# Altium PCB Button-18PCS.PcbDoc
Units mil, origin at the board's own origin, x right, y up, seen from the top; angles counter-clockwise.
Board outline 6000 x 4000 mil, 2 copper layers (Top Layer, Bottom Layer); 54 components, 3 nets, 180 pads, 18 vias.
Unrouted connection lines stored in the file: 51.
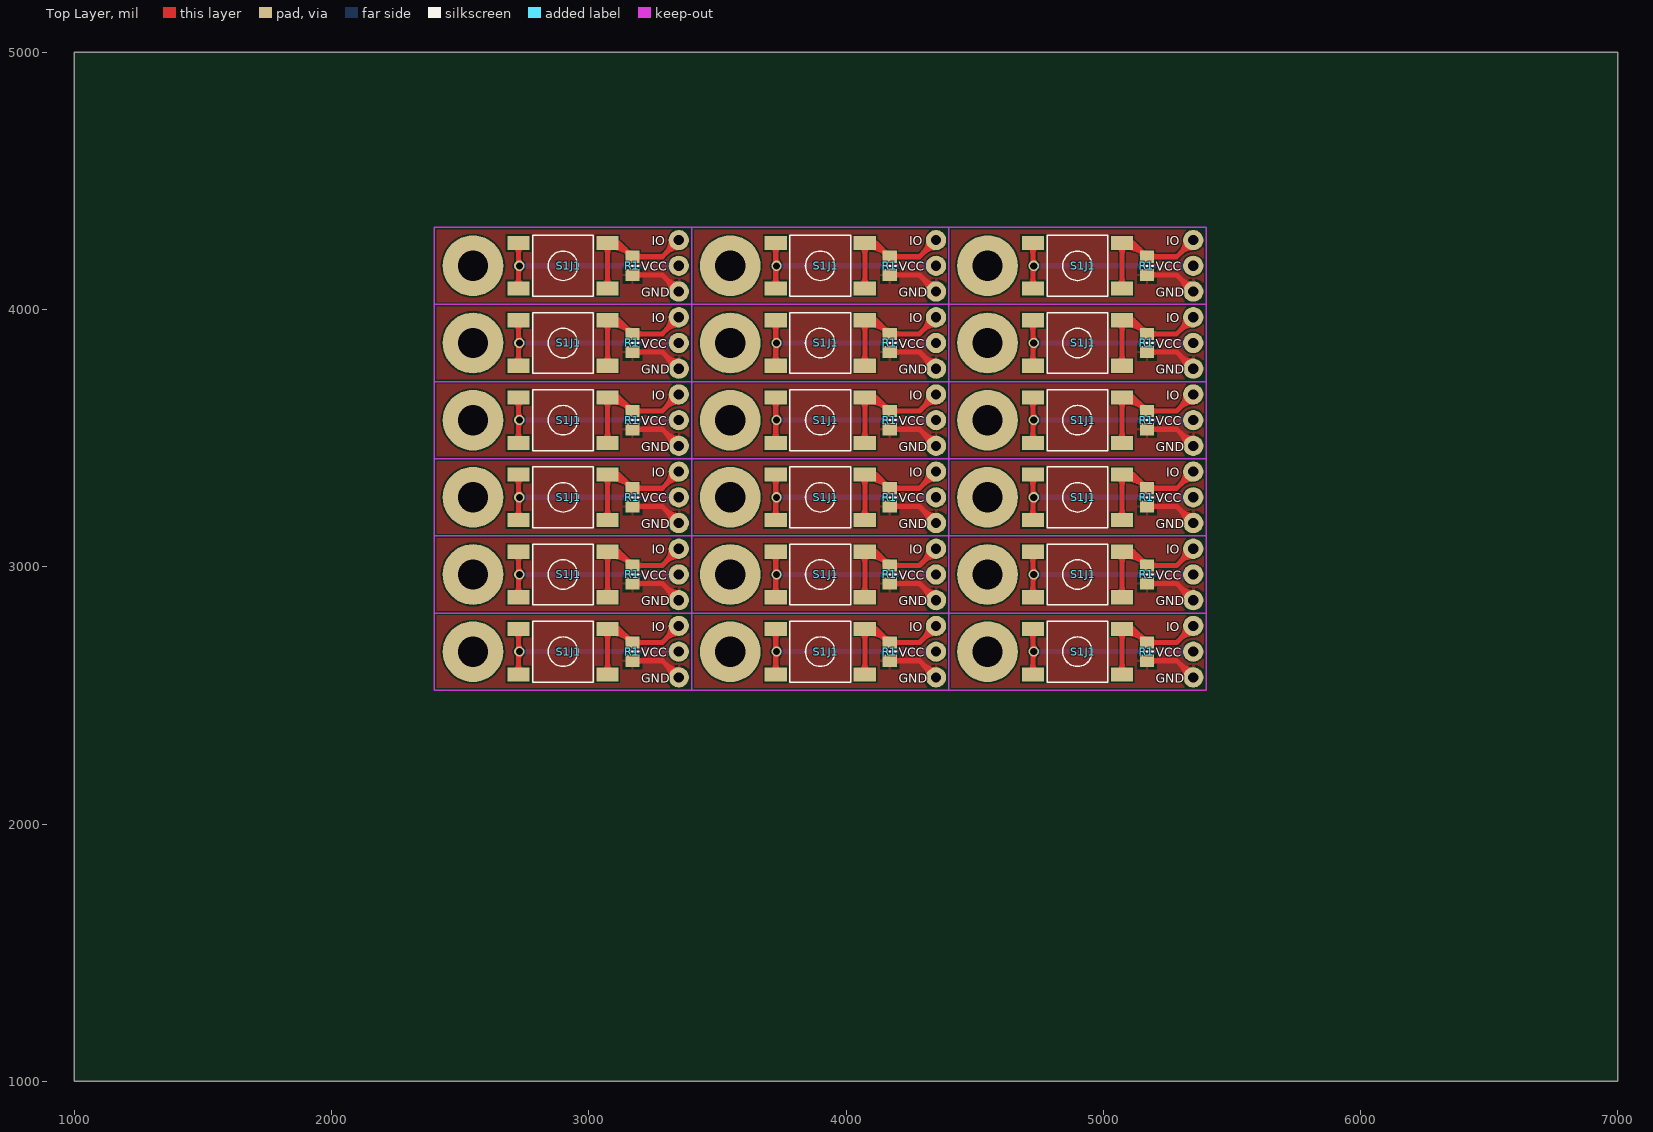
[diagram p0: Top Layer view]
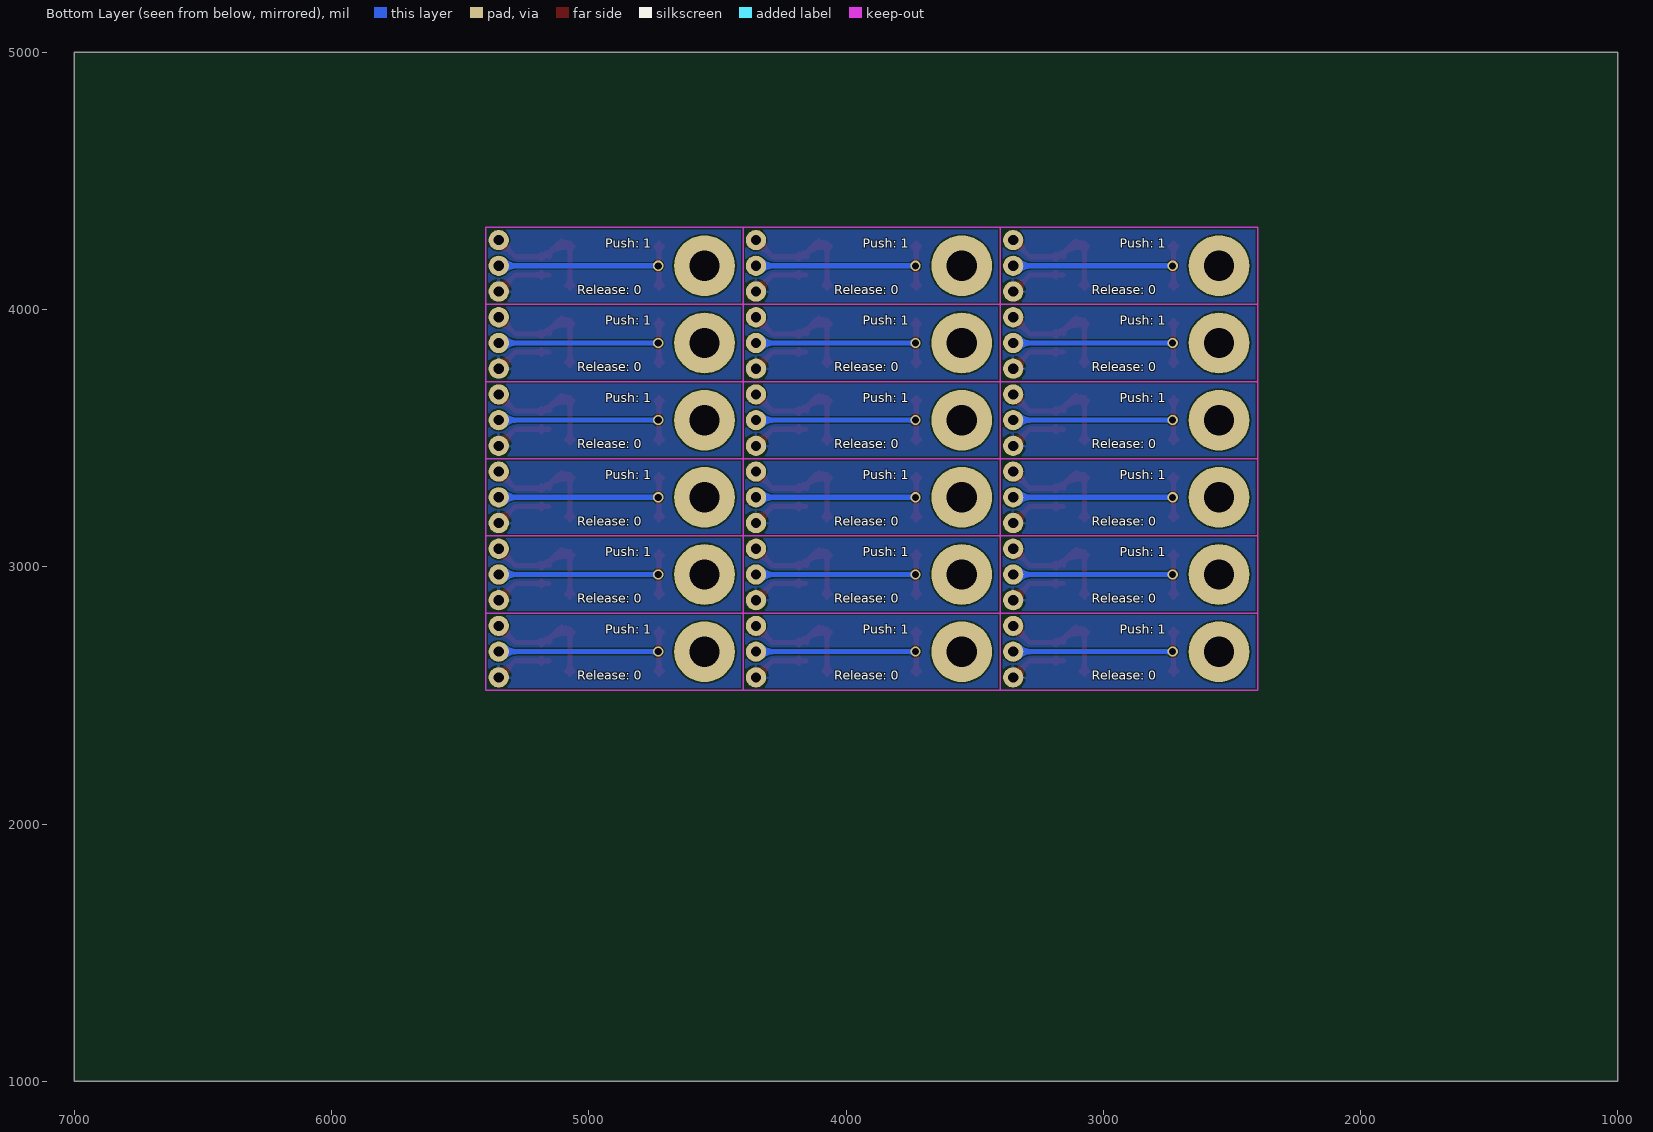
[diagram p1: Bottom Layer view, seen from below]

## Layer stack, top to bottom
Top Solder: solder mask 0.4, Solder Resist, Dk 3.5
Top Layer: signal copper 1.4
Dielectric 1: dielectric 12.6, FR-4, Dk 4.8
Bottom Layer: signal copper 1.4
Bottom Solder: solder mask 0.4, Solder Resist, Dk 3.5

## Board outline
1000,1000 7000,1000 7000,5000 1000,5000

## Design rules (kind name [scope] priority, off if disabled: settings)
Clearance [All] p1: gap=6
ComponentClearance [All] p1: gap=0 collisioncheckmode=3 verticalgap=0 showdistances=FALSE
PolygonConnect [All] p1: connectstyle=Relief reliefconductorwidth=10 reliefentries=4 polygonreliefangle="90 Angle" airgapwidth=10
RoutingVias [All] p1: holewidth=28 width=50 viastyle="Through Hole" minholewidth=28 minwidth=50 maxholewidth=28 maxwidth=50
SolderMaskExpansion [All] p1: expansion=4
Width [All] p1: maxlimit=100 minlimit=6 preferedwidth=10
28 further rules are at their usual default settings.

## Classes and differential pairs
component class Button: J1 R1 S1

## Components (designator, comment, footprint, x,y, rotation, side; value= is the part's Value field where it differs from the comment)
J1 "CON3" DevModule 3900,2970 r0 top
J1 "CON3" DevModule 3900,2670 r0 top
J1 "CON3" DevModule 3900,3570 r0 top
J1 "CON3" DevModule 3900,3270 r0 top
J1 "CON3" DevModule 3900,4170 r0 top
J1 "CON3" DevModule 3900,3870 r0 top
J1 "CON3" DevModule 2900,3870 r0 top
J1 "CON3" DevModule 2900,4170 r0 top
J1 "CON3" DevModule 2900,3270 r0 top
J1 "CON3" DevModule 2900,3570 r0 top
J1 "CON3" DevModule 2900,2670 r0 top
J1 "CON3" DevModule 2900,2970 r0 top
J1 "CON3" DevModule 4900,2970 r0 top
J1 "CON3" DevModule 4900,2670 r0 top
J1 "CON3" DevModule 4900,3570 r0 top
J1 "CON3" DevModule 4900,3270 r0 top
J1 "CON3" DevModule 4900,4170 r0 top
J1 "CON3" DevModule 4900,3870 r0 top
R1 "470R" 6-0805_N 4170,2970 r90 top
R1 "470R" 6-0805_N 4170,2670 r90 top
R1 "470R" 6-0805_N 4170,3570 r90 top
R1 "470R" 6-0805_N 4170,3270 r90 top
R1 "470R" 6-0805_N 4170,4170 r90 top
R1 "470R" 6-0805_N 4170,3870 r90 top
R1 "470R" 6-0805_N 3170,3870 r90 top
R1 "470R" 6-0805_N 3170,4170 r90 top
R1 "470R" 6-0805_N 3170,3270 r90 top
R1 "470R" 6-0805_N 3170,3570 r90 top
R1 "470R" 6-0805_N 3170,2670 r90 top
R1 "470R" 6-0805_N 3170,2970 r90 top
R1 "470R" 6-0805_N 5170,2970 r90 top
R1 "470R" 6-0805_N 5170,2670 r90 top
R1 "470R" 6-0805_N 5170,3570 r90 top
R1 "470R" 6-0805_N 5170,3270 r90 top
R1 "470R" 6-0805_N 5170,4170 r90 top
R1 "470R" 6-0805_N 5170,3870 r90 top
S1 "Button" KFCA06 3900,2970 r180 top
S1 "Button" KFCA06 3900,2670 r180 top
S1 "Button" KFCA06 3900,3570 r180 top
S1 "Button" KFCA06 3900,3270 r180 top
S1 "Button" KFCA06 3900,4170 r180 top
S1 "Button" KFCA06 3900,3870 r180 top
S1 "Button" KFCA06 2900,3870 r180 top
S1 "Button" KFCA06 2900,4170 r180 top
S1 "Button" KFCA06 2900,3270 r180 top
S1 "Button" KFCA06 2900,3570 r180 top
S1 "Button" KFCA06 2900,2670 r180 top
S1 "Button" KFCA06 2900,2970 r180 top
S1 "Button" KFCA06 4900,2970 r180 top
S1 "Button" KFCA06 4900,2670 r180 top
S1 "Button" KFCA06 4900,3570 r180 top
S1 "Button" KFCA06 4900,3270 r180 top
S1 "Button" KFCA06 4900,4170 r180 top
S1 "Button" KFCA06 4900,3870 r180 top

## Footprints (in the part's own frame and the unit in brackets; to place one, negate y for a bottom-side part, rotate by r counter-clockwise, add the part's x,y. Pads: shape width x height; smd on the part's side, far side on the other; paste and mask are expansions set on the pad)
6-0805_N [mm] "Chip Resistor, Body 2.0x1.2mm, IPC Medium Density"
  rect 1.2x1.4 smd: 1(-0.9,0) 2(0.9,0)
  silkscreen extent 0,-0.6 0,0.6, body extent -1.07,-0.7 1.07,0.7, height 0.7
DevModule [mm]
  round 6 hole 3: 0(-8.89,0)
  round 2 hole 1: 1(11.43,2.54) 2(11.43,0) 3(11.43,-2.54)
  Keep-Out Layer lines w0.152: -12.7,-3.81 12.7,-3.81 12.7,3.81 -12.7,3.81 -12.7,-3.81
KFCA06 [mm]
  rect 2.2x1.4 smd: 1(-4.4,-2.25) 1(-4.4,2.25) 2(4.4,-2.25) 2(4.4,2.25)
  silkscreen extent -3,-3 3,3

## Part data
J1 J1 J1 J1 J1 J1 J1 J1 J1 J1 J1 J1 J1 J1 J1 J1 J1 J1: "Connector"
R1 R1 R1 R1 R1 R1 R1 R1 R1 R1 R1 R1 R1 R1 R1 R1 R1 R1: library part RES1_1
S1 S1 S1 S1 S1 S1 S1 S1 S1 S1 S1 S1 S1 S1 S1 S1 S1 S1: library part SW-PB

## Via types
v1: diameter 39.37, hole 27.56, Top Layer to Bottom Layer, tented both sides, 18 vias

## Nets (pads, with @x,y where several pads share a name; then routed paths per layer and width w, separated by ;. In a path a pad name is that pad's centre, name@x,y a point inside that pad or via, vN(x,y) a via of type N, cw(c..) or ccw(c..) an arc to the next point about the centre after c; other vN are vias at no path point)
GND: J1.3 R1.1 | length 6926.1
  Top Layer w20: R1.1@3155,2634.57 3285.43,2634.57 J1.3@3350,2570 ; R1.1@3155,2934.57 3285.43,2934.57 J1.3@3350,2870 ; R1.1@3155,3234.57 3285.43,3234.57 J1.3@3350,3170 ; R1.1@3155,3534.57 3285.43,3534.57 J1.3@3350,3470 ; R1.1@3155,3834.57 3285.43,3834.57 J1.3@3350,3770 ; R1.1@3155,4134.57 3285.43,4134.57 J1.3@3350,4070 ; R1.1@3183.57,2624.93 cw(c3206.82,2601.68) 3206.82,2634.57 cw(c3206.82,2667.45) R1.1@3183.57,2644.2 ; R1.1@3183.57,2924.93 cw(c3206.82,2901.68) 3206.82,2934.57 cw(c3206.82,2967.45) R1.1@3183.57,2944.2 ; R1.1@3183.57,3224.93 cw(c3206.82,3201.68) 3206.82,3234.57 cw(c3206.82,3267.45) R1.1@3183.57,3244.2 ; R1.1@3183.57,3524.93 cw(c3206.82,3501.68) 3206.82,3534.57 cw(c3206.82,3567.45) R1.1@3183.57,3544.2 ; R1.1@3183.57,3824.93 cw(c3206.82,3801.68) 3206.82,3834.57 cw(c3206.82,3867.45) R1.1@3183.57,3844.2 ; R1.1@3183.57,4124.93 cw(c3206.82,4101.68) 3206.82,4134.57 cw(c3206.82,4167.45) R1.1@3183.57,4144.2 ; J1.3@3320.63,2570 ccw(c3249.72,2570) 3299.86,2620.14 ccw(c3350,2670.28) J1.3@3350,2599.37 ; J1.3@3320.63,2870 ccw(c3249.72,2870) 3299.86,2920.14 ccw(c3350,2970.28) J1.3@3350,2899.37 ; J1.3@3320.63,3170 ccw(c3249.72,3170) 3299.86,3220.14 ccw(c3350,3270.28) J1.3@3350,3199.37 ; J1.3@3320.63,3470 ccw(c3249.72,3470) 3299.86,3520.14 ccw(c3350,3570.28) J1.3@3350,3499.37 ; J1.3@3320.63,3770 ccw(c3249.72,3770) 3299.86,3820.14 ccw(c3350,3870.28) J1.3@3350,3799.37 ; J1.3@3320.63,4070 ccw(c3249.72,4070) 3299.86,4120.14 ccw(c3350,4170.28) J1.3@3350,4099.37 ; R1.1@4155,2634.57 4285.43,2634.57 J1.3@4350,2570 ; R1.1@4155,2934.57 4285.43,2934.57 J1.3@4350,2870 ; R1.1@4155,3234.57 4285.43,3234.57 J1.3@4350,3170 ; R1.1@4155,3534.57 4285.43,3534.57 J1.3@4350,3470 ; R1.1@4155,3834.57 4285.43,3834.57 J1.3@4350,3770 ; R1.1@4155,4134.57 4285.43,4134.57 J1.3@4350,4070 ; R1.1@4183.57,2624.93 cw(c4206.82,2601.68) 4206.82,2634.57 cw(c4206.82,2667.45) R1.1@4183.57,2644.2 ; R1.1@4183.57,2924.93 cw(c4206.82,2901.68) 4206.82,2934.57 cw(c4206.82,2967.45) R1.1@4183.57,2944.2 ; R1.1@4183.57,3224.93 cw(c4206.82,3201.68) 4206.82,3234.57 cw(c4206.82,3267.45) R1.1@4183.57,3244.2 ; R1.1@4183.57,3524.93 cw(c4206.82,3501.68) 4206.82,3534.57 cw(c4206.82,3567.45) R1.1@4183.57,3544.2 ; R1.1@4183.57,3824.93 cw(c4206.82,3801.68) 4206.82,3834.57 cw(c4206.82,3867.45) R1.1@4183.57,3844.2 ; R1.1@4183.57,4124.93 cw(c4206.82,4101.68) 4206.82,4134.57 cw(c4206.82,4167.45) R1.1@4183.57,4144.2 ; J1.3@4320.63,2570 ccw(c4249.72,2570) 4299.86,2620.14 ccw(c4350,2670.28) J1.3@4350,2599.37 ; J1.3@4320.63,2870 ccw(c4249.72,2870) 4299.86,2920.14 ccw(c4350,2970.28) J1.3@4350,2899.37 ; J1.3@4320.63,3170 ccw(c4249.72,3170) 4299.86,3220.14 ccw(c4350,3270.28) J1.3@4350,3199.37 ; J1.3@4320.63,3470 ccw(c4249.72,3470) 4299.86,3520.14 ccw(c4350,3570.28) J1.3@4350,3499.37 ; J1.3@4320.63,3770 ccw(c4249.72,3770) 4299.86,3820.14 ccw(c4350,3870.28) J1.3@4350,3799.37 ; J1.3@4320.63,4070 ccw(c4249.72,4070) 4299.86,4120.14 ccw(c4350,4170.28) J1.3@4350,4099.37 ; R1.1@5155,2634.57 5285.43,2634.57 J1.3@5350,2570 ; R1.1@5155,2934.57 5285.43,2934.57 J1.3@5350,2870 ; R1.1@5155,3234.57 5285.43,3234.57 J1.3@5350,3170 ; R1.1@5155,3534.57 5285.43,3534.57 J1.3@5350,3470 ; R1.1@5155,3834.57 5285.43,3834.57 J1.3@5350,3770 ; R1.1@5155,4134.57 5285.43,4134.57 J1.3@5350,4070 ; R1.1@5183.57,2624.93 cw(c5206.82,2601.68) 5206.82,2634.57 cw(c5206.82,2667.45) R1.1@5183.57,2644.2 ; R1.1@5183.57,2924.93 cw(c5206.82,2901.68) 5206.82,2934.57 cw(c5206.82,2967.45) R1.1@5183.57,2944.2 ; R1.1@5183.57,3224.93 cw(c5206.82,3201.68) 5206.82,3234.57 cw(c5206.82,3267.45) R1.1@5183.57,3244.2 ; R1.1@5183.57,3524.93 cw(c5206.82,3501.68) 5206.82,3534.57 cw(c5206.82,3567.45) R1.1@5183.57,3544.2 ; R1.1@5183.57,3824.93 cw(c5206.82,3801.68) 5206.82,3834.57 cw(c5206.82,3867.45) R1.1@5183.57,3844.2 ; R1.1@5183.57,4124.93 cw(c5206.82,4101.68) 5206.82,4134.57 cw(c5206.82,4167.45) R1.1@5183.57,4144.2 ; J1.3@5320.63,2570 ccw(c5249.72,2570) 5299.86,2620.14 ccw(c5350,2670.28) J1.3@5350,2599.37 ; J1.3@5320.63,2870 ccw(c5249.72,2870) 5299.86,2920.14 ccw(c5350,2970.28) J1.3@5350,2899.37 ; J1.3@5320.63,3170 ccw(c5249.72,3170) 5299.86,3220.14 ccw(c5350,3270.28) J1.3@5350,3199.37 ; J1.3@5320.63,3470 ccw(c5249.72,3470) 5299.86,3520.14 ccw(c5350,3570.28) J1.3@5350,3499.37 ; J1.3@5320.63,3770 ccw(c5249.72,3770) 5299.86,3820.14 ccw(c5350,3870.28) J1.3@5350,3799.37 ; J1.3@5320.63,4070 ccw(c5249.72,4070) 5299.86,4120.14 ccw(c5350,4170.28) J1.3@5350,4099.37
NetJ1_1: J1.1 R1.2 S1.1 | length 18268.9
  Top Layer w20: S1.1@3060.81,2593.83 ccw(c3030.84,2623.81) 3073.23,2623.81 ccw(c3115.62,2623.81) S1.1@3085.64,2593.83 ; S1.1@3060.81,2746.17 cw(c3030.84,2716.19) 3073.23,2716.19 cw(c3115.62,2716.19) S1.1@3085.64,2746.17 ; S1.1@3060.81,2893.83 ccw(c3030.84,2923.81) 3073.23,2923.81 ccw(c3115.62,2923.81) S1.1@3085.64,2893.83 ; S1.1@3060.81,3046.17 cw(c3030.84,3016.19) 3073.23,3016.19 cw(c3115.62,3016.19) S1.1@3085.64,3046.17 ; S1.1@3060.81,3193.83 ccw(c3030.84,3223.81) 3073.23,3223.81 ccw(c3115.62,3223.81) S1.1@3085.64,3193.83 ; S1.1@3060.81,3346.17 cw(c3030.84,3316.19) 3073.23,3316.19 cw(c3115.62,3316.19) S1.1@3085.64,3346.17 ; S1.1@3060.81,3493.83 ccw(c3030.84,3523.81) 3073.23,3523.81 ccw(c3115.62,3523.81) S1.1@3085.64,3493.83 ; S1.1@3060.81,3646.17 cw(c3030.84,3616.19) 3073.23,3616.19 cw(c3115.62,3616.19) S1.1@3085.64,3646.17 ; S1.1@3060.81,3793.83 ccw(c3030.84,3823.81) 3073.23,3823.81 ccw(c3115.62,3823.81) S1.1@3085.64,3793.83 ; S1.1@3060.81,3946.17 cw(c3030.84,3916.19) 3073.23,3916.19 cw(c3115.62,3916.19) S1.1@3085.64,3946.17 ; S1.1@3060.81,4093.83 ccw(c3030.84,4123.81) 3073.23,4123.81 ccw(c3115.62,4123.81) S1.1@3085.64,4093.83 ; S1.1@3060.81,4246.17 cw(c3030.84,4216.19) 3073.23,4216.19 cw(c3115.62,4216.19) S1.1@3085.64,4246.17 ; S1.1@3073.23,2581.42 3073.23,2758.58 3116.85,2758.58 ; S1.1@3073.23,2881.42 3073.23,3058.58 3116.85,3058.58 ; S1.1@3073.23,3181.42 3073.23,3358.58 3116.85,3358.58 ; S1.1@3073.23,3481.42 3073.23,3658.58 3116.85,3658.58 ; S1.1@3073.23,3781.42 3073.23,3958.58 3116.85,3958.58 ; S1.1@3073.23,4081.42 3073.23,4258.58 3116.85,4258.58 ; S1.1@3088.98,2741.02 cw(c3088.98,2631.34) R1.2@3166.54,2708.9 ; S1.1@3088.98,2761.02 cw(c3088.98,2699.62) 3132.39,2743.04 ; S1.1@3088.98,3041.02 cw(c3088.98,2931.34) R1.2@3166.54,3008.9 ; S1.1@3088.98,3061.02 cw(c3088.98,2999.62) 3132.39,3043.04 ; S1.1@3088.98,3341.02 cw(c3088.98,3231.34) R1.2@3166.54,3308.9 ; S1.1@3088.98,3361.02 cw(c3088.98,3299.62) 3132.39,3343.04 ; S1.1@3088.98,3641.02 cw(c3088.98,3531.34) R1.2@3166.54,3608.9 ; S1.1@3088.98,3661.02 cw(c3088.98,3599.62) 3132.39,3643.04 ; S1.1@3088.98,3941.02 cw(c3088.98,3831.34) R1.2@3166.54,3908.9 ; S1.1@3088.98,3961.02 cw(c3088.98,3899.62) 3132.39,3943.04 ; S1.1@3088.98,4241.02 cw(c3088.98,4131.34) R1.2@3166.54,4208.9 ; S1.1@3088.98,4261.02 cw(c3088.98,4199.62) 3132.39,4243.04 ; S1.1@3104.81,2751 cw(c3116.85,2745.24) 3116.85,2758.58 ; S1.1@3104.81,2766.16 ccw(c3116.85,2771.93) 3116.85,2758.58 ; S1.1@3104.81,3051 cw(c3116.85,3045.24) 3116.85,3058.58 ; S1.1@3104.81,3066.16 ccw(c3116.85,3071.93) 3116.85,3058.58 ; S1.1@3104.81,3351 cw(c3116.85,3345.24) 3116.85,3358.58 ; S1.1@3104.81,3366.16 ccw(c3116.85,3371.93) 3116.85,3358.58 ; S1.1@3104.81,3651 cw(c3116.85,3645.24) 3116.85,3658.58 ; S1.1@3104.81,3666.16 ccw(c3116.85,3671.93) 3116.85,3658.58 ; S1.1@3104.81,3951 cw(c3116.85,3945.24) 3116.85,3958.58 ; S1.1@3104.81,3966.16 ccw(c3116.85,3971.93) 3116.85,3958.58 ; S1.1@3104.81,4251 cw(c3116.85,4245.24) 3116.85,4258.58 ; S1.1@3104.81,4266.16 ccw(c3116.85,4271.93) 3116.85,4258.58 ; 3140.02,2735.41 cw(c3110.05,2705.43) R1.2@3152.44,2705.43 ; 3140.02,3035.41 cw(c3110.05,3005.43) R1.2@3152.44,3005.43 ; 3140.02,3335.41 cw(c3110.05,3305.43) R1.2@3152.44,3305.43 ; 3140.02,3635.41 cw(c3110.05,3605.43) R1.2@3152.44,3605.43 ; 3140.02,3935.41 cw(c3110.05,3905.43) R1.2@3152.44,3905.43 ; 3140.02,4235.41 cw(c3110.05,4205.43) R1.2@3152.44,4205.43 ; R1.2@3149.53,2725.9 ccw(c3166.06,2742.44) R1.2@3166.06,2719.06 ; R1.2@3149.53,3025.9 ccw(c3166.06,3042.44) R1.2@3166.06,3019.06 ; R1.2@3149.53,3325.9 ccw(c3166.06,3342.44) R1.2@3166.06,3319.06 ; R1.2@3149.53,3625.9 ccw(c3166.06,3642.44) R1.2@3166.06,3619.06 ; R1.2@3149.53,3925.9 ccw(c3166.06,3942.44) R1.2@3166.06,3919.06 ; R1.2@3149.53,4225.9 ccw(c3166.06,4242.44) R1.2@3166.06,4219.06 ; R1.2@3183.57,2695.8 cw(c3206.82,2672.55) 3206.82,2705.43 cw(c3206.82,2738.32) R1.2@3183.57,2715.07 ; R1.2@3183.57,2995.8 cw(c3206.82,2972.55) 3206.82,3005.43 cw(c3206.82,3038.32) R1.2@3183.57,3015.07 ; R1.2@3183.57,3295.8 cw(c3206.82,3272.55) 3206.82,3305.43 cw(c3206.82,3338.32) R1.2@3183.57,3315.07 ; R1.2@3183.57,3595.8 cw(c3206.82,3572.55) 3206.82,3605.43 cw(c3206.82,3638.32) R1.2@3183.57,3615.07 ; R1.2@3183.57,3895.8 cw(c3206.82,3872.55) 3206.82,3905.43 cw(c3206.82,3938.32) R1.2@3183.57,3915.07 ; R1.2@3183.57,4195.8 cw(c3206.82,4172.55) 3206.82,4205.43 cw(c3206.82,4238.32) R1.2@3183.57,4215.07 ; J1.1@3320.63,2770 cw(c3249.72,2770) 3299.86,2719.86 cw(c3350,2669.72) J1.1@3350,2740.63 ; J1.1@3320.63,3070 cw(c3249.72,3070) 3299.86,3019.86 cw(c3350,2969.72) J1.1@3350,3040.63 ; J1.1@3320.63,3370 cw(c3249.72,3370) 3299.86,3319.86 cw(c3350,3269.72) J1.1@3350,3340.63 ; J1.1@3320.63,3670 cw(c3249.72,3670) 3299.86,3619.86 cw(c3350,3569.72) J1.1@3350,3640.63 ; J1.1@3320.63,3970 cw(c3249.72,3970) 3299.86,3919.86 cw(c3350,3869.72) J1.1@3350,3940.63 ; J1.1@3320.63,4270 cw(c3249.72,4270) 3299.86,4219.86 cw(c3350,4169.72) J1.1@3350,4240.63 ; J1.1@3350,2770 3285.43,2705.43 3170,2705.43 3116.85,2758.58 ; J1.1@3350,3070 3285.43,3005.43 3170,3005.43 3116.85,3058.58 ; J1.1@3350,3370 3285.43,3305.43 3170,3305.43 3116.85,3358.58 ; J1.1@3350,3670 3285.43,3605.43 3170,3605.43 3116.85,3658.58 ; J1.1@3350,3970 3285.43,3905.43 3170,3905.43 3116.85,3958.58 ; J1.1@3350,4270 3285.43,4205.43 3170,4205.43 3116.85,4258.58 ; S1.1@4060.81,2593.83 ccw(c4030.84,2623.81) 4073.23,2623.81 ccw(c4115.62,2623.81) S1.1@4085.64,2593.83 ; S1.1@4060.81,2746.17 cw(c4030.84,2716.19) 4073.23,2716.19 cw(c4115.62,2716.19) S1.1@4085.64,2746.17 ; S1.1@4060.81,2893.83 ccw(c4030.84,2923.81) 4073.23,2923.81 ccw(c4115.62,2923.81) S1.1@4085.64,2893.83 ; S1.1@4060.81,3046.17 cw(c4030.84,3016.19) 4073.23,3016.19 cw(c4115.62,3016.19) S1.1@4085.64,3046.17 ; S1.1@4060.81,3193.83 ccw(c4030.84,3223.81) 4073.23,3223.81 ccw(c4115.62,3223.81) S1.1@4085.64,3193.83 ; S1.1@4060.81,3346.17 cw(c4030.84,3316.19) 4073.23,3316.19 cw(c4115.62,3316.19) S1.1@4085.64,3346.17 ; S1.1@4060.81,3493.83 ccw(c4030.84,3523.81) 4073.23,3523.81 ccw(c4115.62,3523.81) S1.1@4085.64,3493.83 ; S1.1@4060.81,3646.17 cw(c4030.84,3616.19) 4073.23,3616.19 cw(c4115.62,3616.19) S1.1@4085.64,3646.17 ; S1.1@4060.81,3793.83 ccw(c4030.84,3823.81) 4073.23,3823.81 ccw(c4115.62,3823.81) S1.1@4085.64,3793.83 ; S1.1@4060.81,3946.17 cw(c4030.84,3916.19) 4073.23,3916.19 cw(c4115.62,3916.19) S1.1@4085.64,3946.17 ; S1.1@4060.81,4093.83 ccw(c4030.84,4123.81) 4073.23,4123.81 ccw(c4115.62,4123.81) S1.1@4085.64,4093.83 ; S1.1@4060.81,4246.17 cw(c4030.84,4216.19) 4073.23,4216.19 cw(c4115.62,4216.19) S1.1@4085.64,4246.17 ; S1.1@4073.23,2581.42 4073.23,2758.58 4116.85,2758.58 ; S1.1@4073.23,2881.42 4073.23,3058.58 4116.85,3058.58 ; S1.1@4073.23,3181.42 4073.23,3358.58 4116.85,3358.58 ; S1.1@4073.23,3481.42 4073.23,3658.58 4116.85,3658.58 ; S1.1@4073.23,3781.42 4073.23,3958.58 4116.85,3958.58 ; S1.1@4073.23,4081.42 4073.23,4258.58 4116.85,4258.58 ; S1.1@4088.98,2741.02 cw(c4088.98,2631.34) R1.2@4166.54,2708.9 ; S1.1@4088.98,2761.02 cw(c4088.98,2699.62) 4132.39,2743.04 ; S1.1@4088.98,3041.02 cw(c4088.98,2931.34) R1.2@4166.54,3008.9 ; S1.1@4088.98,3061.02 cw(c4088.98,2999.62) 4132.39,3043.04 ; S1.1@4088.98,3341.02 cw(c4088.98,3231.34) R1.2@4166.54,3308.9 ; S1.1@4088.98,3361.02 cw(c4088.98,3299.62) 4132.39,3343.04 ; S1.1@4088.98,3641.02 cw(c4088.98,3531.34) R1.2@4166.54,3608.9 ; S1.1@4088.98,3661.02 cw(c4088.98,3599.62) 4132.39,3643.04 ; S1.1@4088.98,3941.02 cw(c4088.98,3831.34) R1.2@4166.54,3908.9 ; S1.1@4088.98,3961.02 cw(c4088.98,3899.62) 4132.39,3943.04 ; S1.1@4088.98,4241.02 cw(c4088.98,4131.34) R1.2@4166.54,4208.9 ; S1.1@4088.98,4261.02 cw(c4088.98,4199.62) 4132.39,4243.04 ; S1.1@4104.81,2751 cw(c4116.85,2745.24) 4116.85,2758.58 ; S1.1@4104.81,2766.16 ccw(c4116.85,2771.93) 4116.85,2758.58 ; S1.1@4104.81,3051 cw(c4116.85,3045.24) 4116.85,3058.58 ; S1.1@4104.81,3066.16 ccw(c4116.85,3071.93) 4116.85,3058.58 ; S1.1@4104.81,3351 cw(c4116.85,3345.24) 4116.85,3358.58 ; S1.1@4104.81,3366.16 ccw(c4116.85,3371.93) 4116.85,3358.58 ; S1.1@4104.81,3651 cw(c4116.85,3645.24) 4116.85,3658.58 ; S1.1@4104.81,3666.16 ccw(c4116.85,3671.93) 4116.85,3658.58 ; S1.1@4104.81,3951 cw(c4116.85,3945.24) 4116.85,3958.58 ; S1.1@4104.81,3966.16 ccw(c4116.85,3971.93) 4116.85,3958.58 ; S1.1@4104.81,4251 cw(c4116.85,4245.24) 4116.85,4258.58 ; S1.1@4104.81,4266.16 ccw(c4116.85,4271.93) 4116.85,4258.58 ; 4140.02,2735.41 cw(c4110.05,2705.43) R1.2@4152.44,2705.43 ; 4140.02,3035.41 cw(c4110.05,3005.43) R1.2@4152.44,3005.43 ; 4140.02,3335.41 cw(c4110.05,3305.43) R1.2@4152.44,3305.43 ; 4140.02,3635.41 cw(c4110.05,3605.43) R1.2@4152.44,3605.43 ; 4140.02,3935.41 cw(c4110.05,3905.43) R1.2@4152.44,3905.43 ; 4140.02,4235.41 cw(c4110.05,4205.43) R1.2@4152.44,4205.43 ; R1.2@4149.53,2725.9 ccw(c4166.06,2742.44) R1.2@4166.06,2719.06 ; R1.2@4149.53,3025.9 ccw(c4166.06,3042.44) R1.2@4166.06,3019.06 ; R1.2@4149.53,3325.9 ccw(c4166.06,3342.44) R1.2@4166.06,3319.06 ; R1.2@4149.53,3625.9 ccw(c4166.06,3642.44) R1.2@4166.06,3619.06 ; R1.2@4149.53,3925.9 ccw(c4166.06,3942.44) R1.2@4166.06,3919.06 ; R1.2@4149.53,4225.9 ccw(c4166.06,4242.44) R1.2@4166.06,4219.06 ; R1.2@4183.57,2695.8 cw(c4206.82,2672.55) 4206.82,2705.43 cw(c4206.82,2738.32) R1.2@4183.57,2715.07 ; R1.2@4183.57,2995.8 cw(c4206.82,2972.55) 4206.82,3005.43 cw(c4206.82,3038.32) R1.2@4183.57,3015.07 ; R1.2@4183.57,3295.8 cw(c4206.82,3272.55) 4206.82,3305.43 cw(c4206.82,3338.32) R1.2@4183.57,3315.07 ; R1.2@4183.57,3595.8 cw(c4206.82,3572.55) 4206.82,3605.43 cw(c4206.82,3638.32) R1.2@4183.57,3615.07 ; R1.2@4183.57,3895.8 cw(c4206.82,3872.55) 4206.82,3905.43 cw(c4206.82,3938.32) R1.2@4183.57,3915.07 ; R1.2@4183.57,4195.8 cw(c4206.82,4172.55) 4206.82,4205.43 cw(c4206.82,4238.32) R1.2@4183.57,4215.07 ; J1.1@4320.63,2770 cw(c4249.72,2770) 4299.86,2719.86 cw(c4350,2669.72) J1.1@4350,2740.63 ; J1.1@4320.63,3070 cw(c4249.72,3070) 4299.86,3019.86 cw(c4350,2969.72) J1.1@4350,3040.63 ; J1.1@4320.63,3370 cw(c4249.72,3370) 4299.86,3319.86 cw(c4350,3269.72) J1.1@4350,3340.63 ; J1.1@4320.63,3670 cw(c4249.72,3670) 4299.86,3619.86 cw(c4350,3569.72) J1.1@4350,3640.63 ; J1.1@4320.63,3970 cw(c4249.72,3970) 4299.86,3919.86 cw(c4350,3869.72) J1.1@4350,3940.63 ; J1.1@4320.63,4270 cw(c4249.72,4270) 4299.86,4219.86 cw(c4350,4169.72) J1.1@4350,4240.63 ; J1.1@4350,2770 4285.43,2705.43 4170,2705.43 4116.85,2758.58 ; J1.1@4350,3070 4285.43,3005.43 4170,3005.43 4116.85,3058.58 ; J1.1@4350,3370 4285.43,3305.43 4170,3305.43 4116.85,3358.58 ; J1.1@4350,3670 4285.43,3605.43 4170,3605.43 4116.85,3658.58 ; J1.1@4350,3970 4285.43,3905.43 4170,3905.43 4116.85,3958.58 ; J1.1@4350,4270 4285.43,4205.43 4170,4205.43 4116.85,4258.58 ; S1.1@5060.81,2593.83 ccw(c5030.84,2623.81) 5073.23,2623.81 ccw(c5115.62,2623.81) S1.1@5085.64,2593.83 ; S1.1@5060.81,2746.17 cw(c5030.84,2716.19) 5073.23,2716.19 cw(c5115.62,2716.19) S1.1@5085.64,2746.17 ; S1.1@5060.81,2893.83 ccw(c5030.84,2923.81) 5073.23,2923.81 ccw(c5115.62,2923.81) S1.1@5085.64,2893.83 ; S1.1@5060.81,3046.17 cw(c5030.84,3016.19) 5073.23,3016.19 cw(c5115.62,3016.19) S1.1@5085.64,3046.17 ; S1.1@5060.81,3193.83 ccw(c5030.84,3223.81) 5073.23,3223.81 ccw(c5115.62,3223.81) S1.1@5085.64,3193.83 ; S1.1@5060.81,3346.17 cw(c5030.84,3316.19) 5073.23,3316.19 cw(c5115.62,3316.19) S1.1@5085.64,3346.17 ; S1.1@5060.81,3493.83 ccw(c5030.84,3523.81) 5073.23,3523.81 ccw(c5115.62,3523.81) S1.1@5085.64,3493.83 ; S1.1@5060.81,3646.17 cw(c5030.84,3616.19) 5073.23,3616.19 cw(c5115.62,3616.19) S1.1@5085.64,3646.17 ; S1.1@5060.81,3793.83 ccw(c5030.84,3823.81) 5073.23,3823.81 ccw(c5115.62,3823.81) S1.1@5085.64,3793.83 ; S1.1@5060.81,3946.17 cw(c5030.84,3916.19) 5073.23,3916.19 cw(c5115.62,3916.19) S1.1@5085.64,3946.17 ; S1.1@5060.81,4093.83 ccw(c5030.84,4123.81) 5073.23,4123.81 ccw(c5115.62,4123.81) S1.1@5085.64,4093.83 ; S1.1@5060.81,4246.17 cw(c5030.84,4216.19) 5073.23,4216.19 cw(c5115.62,4216.19) S1.1@5085.64,4246.17 ; S1.1@5073.23,2581.42 5073.23,2758.58 5116.85,2758.58 ; S1.1@5073.23,2881.42 5073.23,3058.58 5116.85,3058.58 ; S1.1@5073.23,3181.42 5073.23,3358.58 5116.85,3358.58 ; S1.1@5073.23,3481.42 5073.23,3658.58 5116.85,3658.58 ; S1.1@5073.23,3781.42 5073.23,3958.58 5116.85,3958.58 ; S1.1@5073.23,4081.42 5073.23,4258.58 5116.85,4258.58 ; S1.1@5088.98,2741.02 cw(c5088.98,2631.34) R1.2@5166.54,2708.9 ; S1.1@5088.98,2761.02 cw(c5088.98,2699.62) 5132.39,2743.04 ; S1.1@5088.98,3041.02 cw(c5088.98,2931.34) R1.2@5166.54,3008.9 ; S1.1@5088.98,3061.02 cw(c5088.98,2999.62) 5132.39,3043.04 ; S1.1@5088.98,3341.02 cw(c5088.98,3231.34) R1.2@5166.54,3308.9 ; S1.1@5088.98,3361.02 cw(c5088.98,3299.62) 5132.39,3343.04 ; S1.1@5088.98,3641.02 cw(c5088.98,3531.34) R1.2@5166.54,3608.9 ; S1.1@5088.98,3661.02 cw(c5088.98,3599.62) 5132.39,3643.04 ; S1.1@5088.98,3941.02 cw(c5088.98,3831.34) R1.2@5166.54,3908.9 ; S1.1@5088.98,3961.02 cw(c5088.98,3899.62) 5132.39,3943.04 ; S1.1@5088.98,4241.02 cw(c5088.98,4131.34) R1.2@5166.54,4208.9 ; S1.1@5088.98,4261.02 cw(c5088.98,4199.62) 5132.39,4243.04 ; S1.1@5104.81,2751 cw(c5116.85,2745.24) 5116.85,2758.58 ; S1.1@5104.81,2766.16 ccw(c5116.85,2771.93) 5116.85,2758.58 ; S1.1@5104.81,3051 cw(c5116.85,3045.24) 5116.85,3058.58 ; S1.1@5104.81,3066.16 ccw(c5116.85,3071.93) 5116.85,3058.58 ; S1.1@5104.81,3351 cw(c5116.85,3345.24) 5116.85,3358.58 ; S1.1@5104.81,3366.16 ccw(c5116.85,3371.93) 5116.85,3358.58 ; S1.1@5104.81,3651 cw(c5116.85,3645.24) 5116.85,3658.58 ; S1.1@5104.81,3666.16 ccw(c5116.85,3671.93) 5116.85,3658.58 ; S1.1@5104.81,3951 cw(c5116.85,3945.24) 5116.85,3958.58 ; S1.1@5104.81,3966.16 ccw(c5116.85,3971.93) 5116.85,3958.58 ; S1.1@5104.81,4251 cw(c5116.85,4245.24) 5116.85,4258.58 ; S1.1@5104.81,4266.16 ccw(c5116.85,4271.93) 5116.85,4258.58 ; 5140.02,2735.41 cw(c5110.05,2705.43) R1.2@5152.44,2705.43 ; 5140.02,3035.41 cw(c5110.05,3005.43) R1.2@5152.44,3005.43 ; 5140.02,3335.41 cw(c5110.05,3305.43) R1.2@5152.44,3305.43 ; 5140.02,3635.41 cw(c5110.05,3605.43) R1.2@5152.44,3605.43 ; 5140.02,3935.41 cw(c5110.05,3905.43) R1.2@5152.44,3905.43 ; 5140.02,4235.41 cw(c5110.05,4205.43) R1.2@5152.44,4205.43 ; R1.2@5149.53,2725.9 ccw(c5166.06,2742.44) R1.2@5166.06,2719.06 ; R1.2@5149.53,3025.9 ccw(c5166.06,3042.44) R1.2@5166.06,3019.06 ; R1.2@5149.53,3325.9 ccw(c5166.06,3342.44) R1.2@5166.06,3319.06 ; R1.2@5149.53,3625.9 ccw(c5166.06,3642.44) R1.2@5166.06,3619.06 ; R1.2@5149.53,3925.9 ccw(c5166.06,3942.44) R1.2@5166.06,3919.06 ; R1.2@5149.53,4225.9 ccw(c5166.06,4242.44) R1.2@5166.06,4219.06 ; R1.2@5183.57,2695.8 cw(c5206.82,2672.55) 5206.82,2705.43 cw(c5206.82,2738.32) R1.2@5183.57,2715.07 ; R1.2@5183.57,2995.8 cw(c5206.82,2972.55) 5206.82,3005.43 cw(c5206.82,3038.32) R1.2@5183.57,3015.07 ; R1.2@5183.57,3295.8 cw(c5206.82,3272.55) 5206.82,3305.43 cw(c5206.82,3338.32) R1.2@5183.57,3315.07 ; R1.2@5183.57,3595.8 cw(c5206.82,3572.55) 5206.82,3605.43 cw(c5206.82,3638.32) R1.2@5183.57,3615.07 ; R1.2@5183.57,3895.8 cw(c5206.82,3872.55) 5206.82,3905.43 cw(c5206.82,3938.32) R1.2@5183.57,3915.07 ; R1.2@5183.57,4195.8 cw(c5206.82,4172.55) 5206.82,4205.43 cw(c5206.82,4238.32) R1.2@5183.57,4215.07 ; J1.1@5320.63,2770 cw(c5249.72,2770) 5299.86,2719.86 cw(c5350,2669.72) J1.1@5350,2740.63 ; J1.1@5320.63,3070 cw(c5249.72,3070) 5299.86,3019.86 cw(c5350,2969.72) J1.1@5350,3040.63 ; J1.1@5320.63,3370 cw(c5249.72,3370) 5299.86,3319.86 cw(c5350,3269.72) J1.1@5350,3340.63 ; J1.1@5320.63,3670 cw(c5249.72,3670) 5299.86,3619.86 cw(c5350,3569.72) J1.1@5350,3640.63 ; J1.1@5320.63,3970 cw(c5249.72,3970) 5299.86,3919.86 cw(c5350,3869.72) J1.1@5350,3940.63 ; J1.1@5320.63,4270 cw(c5249.72,4270) 5299.86,4219.86 cw(c5350,4169.72) J1.1@5350,4240.63 ; J1.1@5350,2770 5285.43,2705.43 5170,2705.43 5116.85,2758.58 ; J1.1@5350,3070 5285.43,3005.43 5170,3005.43 5116.85,3058.58 ; J1.1@5350,3370 5285.43,3305.43 5170,3305.43 5116.85,3358.58 ; J1.1@5350,3670 5285.43,3605.43 5170,3605.43 5116.85,3658.58 ; J1.1@5350,3970 5285.43,3905.43 5170,3905.43 5116.85,3958.58 ; J1.1@5350,4270 5285.43,4205.43 5170,4205.43 5116.85,4258.58
VCC: J1.2 S1.2 | length 20384.8
  Top Layer w20: S1.2@2714.36,2593.83 ccw(c2684.38,2623.81) 2726.77,2623.81 ccw(c2769.16,2623.81) S1.2@2739.19,2593.83 ; S1.2@2714.36,2746.17 cw(c2684.38,2716.19) 2726.77,2716.19 cw(c2769.16,2716.19) S1.2@2739.19,2746.17 ; S1.2@2714.36,2893.83 ccw(c2684.38,2923.81) 2726.77,2923.81 ccw(c2769.16,2923.81) S1.2@2739.19,2893.83 ; S1.2@2714.36,3046.17 cw(c2684.38,3016.19) 2726.77,3016.19 cw(c2769.16,3016.19) S1.2@2739.19,3046.17 ; S1.2@2714.36,3193.83 ccw(c2684.38,3223.81) 2726.77,3223.81 ccw(c2769.16,3223.81) S1.2@2739.19,3193.83 ; S1.2@2714.36,3346.17 cw(c2684.38,3316.19) 2726.77,3316.19 cw(c2769.16,3316.19) S1.2@2739.19,3346.17 ; S1.2@2714.36,3493.83 ccw(c2684.38,3523.81) 2726.77,3523.81 ccw(c2769.16,3523.81) S1.2@2739.19,3493.83 ; S1.2@2714.36,3646.17 cw(c2684.38,3616.19) 2726.77,3616.19 cw(c2769.16,3616.19) S1.2@2739.19,3646.17 ; S1.2@2714.36,3793.83 ccw(c2684.38,3823.81) 2726.77,3823.81 ccw(c2769.16,3823.81) S1.2@2739.19,3793.83 ; S1.2@2714.36,3946.17 cw(c2684.38,3916.19) 2726.77,3916.19 cw(c2769.16,3916.19) S1.2@2739.19,3946.17 ; S1.2@2714.36,4093.83 ccw(c2684.38,4123.81) 2726.77,4123.81 ccw(c2769.16,4123.81) S1.2@2739.19,4093.83 ; S1.2@2714.36,4246.17 cw(c2684.38,4216.19) 2726.77,4216.19 cw(c2769.16,4216.19) S1.2@2739.19,4246.17 ; S1.2@2726.77,2581.42 S1.2@2726.77,2758.58 ; 2726.77,2638.82 cw(c2761.18,2638.82) v1@2736.85,2663.15 ; 2726.77,2701.18 ccw(c2761.18,2701.18) v1@2736.85,2676.85 ; S1.2@2726.77,2881.42 S1.2@2726.77,3058.58 ; 2726.77,2938.82 cw(c2761.18,2938.82) v1@2736.85,2963.15 ; 2726.77,3001.18 ccw(c2761.18,3001.18) v1@2736.85,2976.85 ; S1.2@2726.77,3181.42 S1.2@2726.77,3358.58 ; 2726.77,3238.82 cw(c2761.18,3238.82) v1@2736.85,3263.15 ; 2726.77,3301.18 ccw(c2761.18,3301.18) v1@2736.85,3276.85 ; S1.2@2726.77,3481.42 S1.2@2726.77,3658.58 ; 2726.77,3538.82 cw(c2761.18,3538.82) v1@2736.85,3563.15 ; 2726.77,3601.18 ccw(c2761.18,3601.18) v1@2736.85,3576.85 ; S1.2@2726.77,3781.42 S1.2@2726.77,3958.58 ; 2726.77,3838.82 cw(c2761.18,3838.82) v1@2736.85,3863.15 ; 2726.77,3901.18 ccw(c2761.18,3901.18) v1@2736.85,3876.85 ; S1.2@2726.77,4081.42 S1.2@2726.77,4258.58 ; 2726.77,4138.82 cw(c2761.18,4138.82) v1@2736.85,4163.15 ; 2726.77,4201.18 ccw(c2761.18,4201.18) v1@2736.85,4176.85 ; S1.2@3714.36,2593.83 ccw(c3684.38,2623.81) 3726.77,2623.81 ccw(c3769.16,2623.81) S1.2@3739.19,2593.83 ; S1.2@3714.36,2746.17 cw(c3684.38,2716.19) 3726.77,2716.19 cw(c3769.16,2716.19) S1.2@3739.19,2746.17 ; S1.2@3714.36,2893.83 ccw(c3684.38,2923.81) 3726.77,2923.81 ccw(c3769.16,2923.81) S1.2@3739.19,2893.83 ; S1.2@3714.36,3046.17 cw(c3684.38,3016.19) 3726.77,3016.19 cw(c3769.16,3016.19) S1.2@3739.19,3046.17 ; S1.2@3714.36,3193.83 ccw(c3684.38,3223.81) 3726.77,3223.81 ccw(c3769.16,3223.81) S1.2@3739.19,3193.83 ; S1.2@3714.36,3346.17 cw(c3684.38,3316.19) 3726.77,3316.19 cw(c3769.16,3316.19) S1.2@3739.19,3346.17 ; S1.2@3714.36,3493.83 ccw(c3684.38,3523.81) 3726.77,3523.81 ccw(c3769.16,3523.81) S1.2@3739.19,3493.83 ; S1.2@3714.36,3646.17 cw(c3684.38,3616.19) 3726.77,3616.19 cw(c3769.16,3616.19) S1.2@3739.19,3646.17 ; S1.2@3714.36,3793.83 ccw(c3684.38,3823.81) 3726.77,3823.81 ccw(c3769.16,3823.81) S1.2@3739.19,3793.83 ; S1.2@3714.36,3946.17 cw(c3684.38,3916.19) 3726.77,3916.19 cw(c3769.16,3916.19) S1.2@3739.19,3946.17 ; S1.2@3714.36,4093.83 ccw(c3684.38,4123.81) 3726.77,4123.81 ccw(c3769.16,4123.81) S1.2@3739.19,4093.83 ; S1.2@3714.36,4246.17 cw(c3684.38,4216.19) 3726.77,4216.19 cw(c3769.16,4216.19) S1.2@3739.19,4246.17 ; S1.2@3726.77,2581.42 S1.2@3726.77,2758.58 ; 3726.77,2638.82 cw(c3761.18,2638.82) v1@3736.85,2663.15 ; 3726.77,2701.18 ccw(c3761.18,2701.18) v1@3736.85,2676.85 ; S1.2@3726.77,2881.42 S1.2@3726.77,3058.58 ; 3726.77,2938.82 cw(c3761.18,2938.82) v1@3736.85,2963.15 ; 3726.77,3001.18 ccw(c3761.18,3001.18) v1@3736.85,2976.85 ; S1.2@3726.77,3181.42 S1.2@3726.77,3358.58 ; 3726.77,3238.82 cw(c3761.18,3238.82) v1@3736.85,3263.15 ; 3726.77,3301.18 ccw(c3761.18,3301.18) v1@3736.85,3276.85 ; S1.2@3726.77,3481.42 S1.2@3726.77,3658.58 ; 3726.77,3538.82 cw(c3761.18,3538.82) v1@3736.85,3563.15 ; 3726.77,3601.18 ccw(c3761.18,3601.18) v1@3736.85,3576.85 ; S1.2@3726.77,3781.42 S1.2@3726.77,3958.58 ; 3726.77,3838.82 cw(c3761.18,3838.82) v1@3736.85,3863.15 ; 3726.77,3901.18 ccw(c3761.18,3901.18) v1@3736.85,3876.85 ; S1.2@3726.77,4081.42 S1.2@3726.77,4258.58 ; 3726.77,4138.82 cw(c3761.18,4138.82) v1@3736.85,4163.15 ; 3726.77,4201.18 ccw(c3761.18,4201.18) v1@3736.85,4176.85 ; S1.2@4714.36,2593.83 ccw(c4684.38,2623.81) 4726.77,2623.81 ccw(c4769.16,2623.81) S1.2@4739.19,2593.83 ; S1.2@4714.36,2746.17 cw(c4684.38,2716.19) 4726.77,2716.19 cw(c4769.16,2716.19) S1.2@4739.19,2746.17 ; S1.2@4714.36,2893.83 ccw(c4684.38,2923.81) 4726.77,2923.81 ccw(c4769.16,2923.81) S1.2@4739.19,2893.83 ; S1.2@4714.36,3046.17 cw(c4684.38,3016.19) 4726.77,3016.19 cw(c4769.16,3016.19) S1.2@4739.19,3046.17 ; S1.2@4714.36,3193.83 ccw(c4684.38,3223.81) 4726.77,3223.81 ccw(c4769.16,3223.81) S1.2@4739.19,3193.83 ; S1.2@4714.36,3346.17 cw(c4684.38,3316.19) 4726.77,3316.19 cw(c4769.16,3316.19) S1.2@4739.19,3346.17 ; S1.2@4714.36,3493.83 ccw(c4684.38,3523.81) 4726.77,3523.81 ccw(c4769.16,3523.81) S1.2@4739.19,3493.83 ; S1.2@4714.36,3646.17 cw(c4684.38,3616.19) 4726.77,3616.19 cw(c4769.16,3616.19) S1.2@4739.19,3646.17 ; S1.2@4714.36,3793.83 ccw(c4684.38,3823.81) 4726.77,3823.81 ccw(c4769.16,3823.81) S1.2@4739.19,3793.83 ; S1.2@4714.36,3946.17 cw(c4684.38,3916.19) 4726.77,3916.19 cw(c4769.16,3916.19) S1.2@4739.19,3946.17 ; S1.2@4714.36,4093.83 ccw(c4684.38,4123.81) 4726.77,4123.81 ccw(c4769.16,4123.81) S1.2@4739.19,4093.83 ; S1.2@4714.36,4246.17 cw(c4684.38,4216.19) 4726.77,4216.19 cw(c4769.16,4216.19) S1.2@4739.19,4246.17 ; S1.2@4726.77,2581.42 S1.2@4726.77,2758.58 ; 4726.77,2638.82 cw(c4761.18,2638.82) v1@4736.85,2663.15 ; 4726.77,2701.18 ccw(c4761.18,2701.18) v1@4736.85,2676.85 ; S1.2@4726.77,2881.42 S1.2@4726.77,3058.58 ; 4726.77,2938.82 cw(c4761.18,2938.82) v1@4736.85,2963.15 ; 4726.77,3001.18 ccw(c4761.18,3001.18) v1@4736.85,2976.85 ; S1.2@4726.77,3181.42 S1.2@4726.77,3358.58 ; 4726.77,3238.82 cw(c4761.18,3238.82) v1@4736.85,3263.15 ; 4726.77,3301.18 ccw(c4761.18,3301.18) v1@4736.85,3276.85 ; S1.2@4726.77,3481.42 S1.2@4726.77,3658.58 ; 4726.77,3538.82 cw(c4761.18,3538.82) v1@4736.85,3563.15 ; 4726.77,3601.18 ccw(c4761.18,3601.18) v1@4736.85,3576.85 ; S1.2@4726.77,3781.42 S1.2@4726.77,3958.58 ; 4726.77,3838.82 cw(c4761.18,3838.82) v1@4736.85,3863.15 ; 4726.77,3901.18 ccw(c4761.18,3901.18) v1@4736.85,3876.85 ; S1.2@4726.77,4081.42 S1.2@4726.77,4258.58 ; 4726.77,4138.82 cw(c4761.18,4138.82) v1@4736.85,4163.15 ; 4726.77,4201.18 ccw(c4761.18,4201.18) v1@4736.85,4176.85
  Bottom Layer w20: v1(2730,2670) J1.2@3350,2670 ; v1(2730,2970) J1.2@3350,2970 ; v1(2730,3270) J1.2@3350,3270 ; v1(2730,3570) J1.2@3350,3570 ; v1(2730,3870) J1.2@3350,3870 ; v1(2730,4170) J1.2@3350,4170 ; v1@2736.85,2663.15 cw(c2753.38,2646.62) 2753.38,2670 cw(c2753.38,2693.38) v1@2736.85,2676.85 ; v1@2736.85,2963.15 cw(c2753.38,2946.62) 2753.38,2970 cw(c2753.38,2993.38) v1@2736.85,2976.85 ; v1@2736.85,3263.15 cw(c2753.38,3246.62) 2753.38,3270 cw(c2753.38,3293.38) v1@2736.85,3276.85 ; v1@2736.85,3563.15 cw(c2753.38,3546.62) 2753.38,3570 cw(c2753.38,3593.38) v1@2736.85,3576.85 ; v1@2736.85,3863.15 cw(c2753.38,3846.62) 2753.38,3870 cw(c2753.38,3893.38) v1@2736.85,3876.85 ; v1@2736.85,4163.15 cw(c2753.38,4146.62) 2753.38,4170 cw(c2753.38,4193.38) v1@2736.85,4176.85 ; J1.2@3329.23,2649.23 ccw(c3279.09,2599.09) 3279.09,2670 ccw(c3279.09,2740.91) J1.2@3329.23,2690.77 ; J1.2@3329.23,2949.23 ccw(c3279.09,2899.09) 3279.09,2970 ccw(c3279.09,3040.91) J1.2@3329.23,2990.77 ; J1.2@3329.23,3249.23 ccw(c3279.09,3199.09) 3279.09,3270 ccw(c3279.09,3340.91) J1.2@3329.23,3290.77 ; J1.2@3329.23,3549.23 ccw(c3279.09,3499.09) 3279.09,3570 ccw(c3279.09,3640.91) J1.2@3329.23,3590.77 ; J1.2@3329.23,3849.23 ccw(c3279.09,3799.09) 3279.09,3870 ccw(c3279.09,3940.91) J1.2@3329.23,3890.77 ; J1.2@3329.23,4149.23 ccw(c3279.09,4099.09) 3279.09,4170 ccw(c3279.09,4240.91) J1.2@3329.23,4190.77 ; v1(3730,2670) J1.2@4350,2670 ; v1(3730,2970) J1.2@4350,2970 ; v1(3730,3270) J1.2@4350,3270 ; v1(3730,3570) J1.2@4350,3570 ; v1(3730,3870) J1.2@4350,3870 ; v1(3730,4170) J1.2@4350,4170 ; v1@3736.85,2663.15 cw(c3753.38,2646.62) 3753.38,2670 cw(c3753.38,2693.38) v1@3736.85,2676.85 ; v1@3736.85,2963.15 cw(c3753.38,2946.62) 3753.38,2970 cw(c3753.38,2993.38) v1@3736.85,2976.85 ; v1@3736.85,3263.15 cw(c3753.38,3246.62) 3753.38,3270 cw(c3753.38,3293.38) v1@3736.85,3276.85 ; v1@3736.85,3563.15 cw(c3753.38,3546.62) 3753.38,3570 cw(c3753.38,3593.38) v1@3736.85,3576.85 ; v1@3736.85,3863.15 cw(c3753.38,3846.62) 3753.38,3870 cw(c3753.38,3893.38) v1@3736.85,3876.85 ; v1@3736.85,4163.15 cw(c3753.38,4146.62) 3753.38,4170 cw(c3753.38,4193.38) v1@3736.85,4176.85 ; J1.2@4329.23,2649.23 ccw(c4279.09,2599.09) 4279.09,2670 ccw(c4279.09,2740.91) J1.2@4329.23,2690.77 ; J1.2@4329.23,2949.23 ccw(c4279.09,2899.09) 4279.09,2970 ccw(c4279.09,3040.91) J1.2@4329.23,2990.77 ; J1.2@4329.23,3249.23 ccw(c4279.09,3199.09) 4279.09,3270 ccw(c4279.09,3340.91) J1.2@4329.23,3290.77 ; J1.2@4329.23,3549.23 ccw(c4279.09,3499.09) 4279.09,3570 ccw(c4279.09,3640.91) J1.2@4329.23,3590.77 ; J1.2@4329.23,3849.23 ccw(c4279.09,3799.09) 4279.09,3870 ccw(c4279.09,3940.91) J1.2@4329.23,3890.77 ; J1.2@4329.23,4149.23 ccw(c4279.09,4099.09) 4279.09,4170 ccw(c4279.09,4240.91) J1.2@4329.23,4190.77 ; v1(4730,2670) J1.2@5350,2670 ; v1(4730,2970) J1.2@5350,2970 ; v1(4730,3270) J1.2@5350,3270 ; v1(4730,3570) J1.2@5350,3570 ; v1(4730,3870) J1.2@5350,3870 ; v1(4730,4170) J1.2@5350,4170 ; v1@4736.85,2663.15 cw(c4753.38,2646.62) 4753.38,2670 cw(c4753.38,2693.38) v1@4736.85,2676.85 ; v1@4736.85,2963.15 cw(c4753.38,2946.62) 4753.38,2970 cw(c4753.38,2993.38) v1@4736.85,2976.85 ; v1@4736.85,3263.15 cw(c4753.38,3246.62) 4753.38,3270 cw(c4753.38,3293.38) v1@4736.85,3276.85 ; v1@4736.85,3563.15 cw(c4753.38,3546.62) 4753.38,3570 cw(c4753.38,3593.38) v1@4736.85,3576.85 ; v1@4736.85,3863.15 cw(c4753.38,3846.62) 4753.38,3870 cw(c4753.38,3893.38) v1@4736.85,3876.85 ; v1@4736.85,4163.15 cw(c4753.38,4146.62) 4753.38,4170 cw(c4753.38,4193.38) v1@4736.85,4176.85 ; J1.2@5329.23,2649.23 ccw(c5279.09,2599.09) 5279.09,2670 ccw(c5279.09,2740.91) J1.2@5329.23,2690.77 ; J1.2@5329.23,2949.23 ccw(c5279.09,2899.09) 5279.09,2970 ccw(c5279.09,3040.91) J1.2@5329.23,2990.77 ; J1.2@5329.23,3249.23 ccw(c5279.09,3199.09) 5279.09,3270 ccw(c5279.09,3340.91) J1.2@5329.23,3290.77 ; J1.2@5329.23,3549.23 ccw(c5279.09,3499.09) 5279.09,3570 ccw(c5279.09,3640.91) J1.2@5329.23,3590.77 ; J1.2@5329.23,3849.23 ccw(c5279.09,3799.09) 5279.09,3870 ccw(c5279.09,3940.91) J1.2@5329.23,3890.77 ; J1.2@5329.23,4149.23 ccw(c5279.09,4099.09) 5279.09,4170 ccw(c5279.09,4240.91) J1.2@5329.23,4190.77
pads on no net: J1.0

## Polygon pours and split planes (outlines as drawn)
GND on Top Layer "Keep-Out Layer-No Net" (solid, pour order 37): 3401.44,3121.4 4401.44,3121.4 4401.44,2821.4 3401.44,2821.4
GND on Top Layer "Keep-Out Layer-No Net" (solid, pour order 38): 3401.44,2821.4 4401.44,2821.4 4401.44,2521.4 3401.44,2521.4
GND on Top Layer "Keep-Out Layer-No Net" (solid, pour order 39): 3401.44,3721.4 4401.44,3721.4 4401.44,3421.4 3401.44,3421.4
GND on Top Layer "Keep-Out Layer-No Net" (solid, pour order 40): 3401.44,3421.4 4401.44,3421.4 4401.44,3121.4 3401.44,3121.4
GND on Top Layer "Keep-Out Layer-No Net" (solid, pour order 41): 3401.44,4321.4 4401.44,4321.4 4401.44,4021.4 3401.44,4021.4
GND on Top Layer "Keep-Out Layer-No Net" (solid, pour order 42): 3401.44,4021.4 4401.44,4021.4 4401.44,3721.4 3401.44,3721.4
GND on Top Layer "Keep-Out Layer-No Net" (solid, pour order 44): 2401.44,4021.4 3401.44,4021.4 3401.44,3721.4 2401.44,3721.4
GND on Top Layer "Keep-Out Layer-No Net" (solid, pour order 46): 2401.44,4321.4 3401.44,4321.4 3401.44,4021.4 2401.44,4021.4
GND on Top Layer "Keep-Out Layer-No Net" (solid, pour order 48): 2401.44,3421.4 3401.44,3421.4 3401.44,3121.4 2401.44,3121.4
GND on Top Layer "Keep-Out Layer-No Net" (solid, pour order 50): 2401.44,3721.4 3401.44,3721.4 3401.44,3421.4 2401.44,3421.4
GND on Top Layer "Keep-Out Layer-No Net" (solid, pour order 52): 2401.44,2821.4 3401.44,2821.4 3401.44,2521.4 2401.44,2521.4
GND on Top Layer "Keep-Out Layer-No Net" (solid, pour order 54): 2401.44,3121.4 3401.44,3121.4 3401.44,2821.4 2401.44,2821.4
GND on Top Layer "Keep-Out Layer-No Net" (solid, pour order 53): 4401.44,3121.4 5401.44,3121.4 5401.44,2821.4 4401.44,2821.4
GND on Top Layer "Keep-Out Layer-No Net" (solid, pour order 51): 4401.44,2821.4 5401.44,2821.4 5401.44,2521.4 4401.44,2521.4
GND on Top Layer "Keep-Out Layer-No Net" (solid, pour order 49): 4401.44,3721.4 5401.44,3721.4 5401.44,3421.4 4401.44,3421.4
GND on Top Layer "Keep-Out Layer-No Net" (solid, pour order 47): 4401.44,3421.4 5401.44,3421.4 5401.44,3121.4 4401.44,3121.4
GND on Top Layer "Keep-Out Layer-No Net" (solid, pour order 45): 4401.44,4321.4 5401.44,4321.4 5401.44,4021.4 4401.44,4021.4
GND on Top Layer "Keep-Out Layer-No Net" (solid, pour order 43): 4401.44,4021.4 5401.44,4021.4 5401.44,3721.4 4401.44,3721.4
GND on Bottom Layer "Keep-Out Layer-No Net" (solid, pour order 55): 4400,3120 4400,2820 3400,2820 3400,3120
GND on Bottom Layer "Keep-Out Layer-No Net" (solid, pour order 56): 4400,2820 4400,2520 3400,2520 3400,2820
GND on Bottom Layer "Keep-Out Layer-No Net" (solid, pour order 57): 4400,3720 4400,3420 3400,3420 3400,3720
GND on Bottom Layer "Keep-Out Layer-No Net" (solid, pour order 58): 4400,3420 4400,3120 3400,3120 3400,3420
GND on Bottom Layer "Keep-Out Layer-No Net" (solid, pour order 59): 4400,4320 4400,4020 3400,4020 3400,4320
GND on Bottom Layer "Keep-Out Layer-No Net" (solid, pour order 60): 4400,4020 4400,3720 3400,3720 3400,4020
GND on Bottom Layer "Keep-Out Layer-No Net" (solid, pour order 62): 3400,4020 3400,3720 2400,3720 2400,4020
GND on Bottom Layer "Keep-Out Layer-No Net" (solid, pour order 64): 3400,4320 3400,4020 2400,4020 2400,4320
GND on Bottom Layer "Keep-Out Layer-No Net" (solid, pour order 66): 3400,3420 3400,3120 2400,3120 2400,3420
GND on Bottom Layer "Keep-Out Layer-No Net" (solid, pour order 68): 3400,3720 3400,3420 2400,3420 2400,3720
GND on Bottom Layer "Keep-Out Layer-No Net" (solid, pour order 70): 3400,2820 3400,2520 2400,2520 2400,2820
GND on Bottom Layer "Keep-Out Layer-No Net" (solid, pour order 72): 3400,3120 3400,2820 2400,2820 2400,3120
GND on Bottom Layer "Keep-Out Layer-No Net" (solid, pour order 71): 5400,3120 5400,2820 4400,2820 4400,3120
GND on Bottom Layer "Keep-Out Layer-No Net" (solid, pour order 69): 5400,2820 5400,2520 4400,2520 4400,2820
GND on Bottom Layer "Keep-Out Layer-No Net" (solid, pour order 67): 5400,3720 5400,3420 4400,3420 4400,3720
GND on Bottom Layer "Keep-Out Layer-No Net" (solid, pour order 65): 5400,3420 5400,3120 4400,3120 4400,3420
GND on Bottom Layer "Keep-Out Layer-No Net" (solid, pour order 63): 5400,4320 5400,4020 4400,4020 4400,4320
GND on Bottom Layer "Keep-Out Layer-No Net" (solid, pour order 61): 5400,4020 5400,3720 4400,3720 4400,4020

## Silkscreen, mask and mechanical layers (free items; w line width, h text height)
Top Overlay:
  text "IO" at 3245,4250 h35.43
  text "IO" at 4245,4250 h35.43
  text "IO" at 5245,4250 h35.43
  text "VCC" at 3205,4150 h35.43
  text "VCC" at 4205,4150 h35.43
  text "VCC" at 5205,4150 h35.43
  text "GND" at 3205,4050 h35.43
  text "GND" at 4205,4050 h35.43
  text "GND" at 5205,4050 h35.43
  text "IO" at 3245,3950 h35.43
  text "IO" at 4245,3950 h35.43
  text "IO" at 5245,3950 h35.43
  text "VCC" at 3205,3850 h35.43
  text "VCC" at 4205,3850 h35.43
  text "VCC" at 5205,3850 h35.43
  text "GND" at 3205,3750 h35.43
  text "GND" at 4205,3750 h35.43
  text "GND" at 5205,3750 h35.43
  text "IO" at 3245,3650 h35.43
  text "IO" at 4245,3650 h35.43
  text "IO" at 5245,3650 h35.43
  text "VCC" at 3205,3550 h35.43
  text "VCC" at 4205,3550 h35.43
  text "VCC" at 5205,3550 h35.43
  text "GND" at 3205,3450 h35.43
  text "GND" at 4205,3450 h35.43
  text "GND" at 5205,3450 h35.43
  text "IO" at 3245,3350 h35.43
  text "IO" at 4245,3350 h35.43
  text "IO" at 5245,3350 h35.43
  text "VCC" at 3205,3250 h35.43
  text "VCC" at 4205,3250 h35.43
  text "VCC" at 5205,3250 h35.43
  text "GND" at 3205,3150 h35.43
  text "GND" at 4205,3150 h35.43
  text "GND" at 5205,3150 h35.43
  text "IO" at 3245,3050 h35.43
  text "IO" at 4245,3050 h35.43
  text "IO" at 5245,3050 h35.43
  text "VCC" at 3205,2950 h35.43
  text "VCC" at 4205,2950 h35.43
  text "VCC" at 5205,2950 h35.43
  text "GND" at 3205,2850 h35.43
  text "GND" at 4205,2850 h35.43
  text "GND" at 5205,2850 h35.43
  text "IO" at 3245,2750 h35.43
  text "IO" at 4245,2750 h35.43
  text "IO" at 5245,2750 h35.43
  text "VCC" at 3205,2650 h35.43
  text "VCC" at 4205,2650 h35.43
  text "VCC" at 5205,2650 h35.43
  text "GND" at 3205,2550 h35.43
  text "GND" at 4205,2550 h35.43
  text "GND" at 5205,2550 h35.43
Bottom Overlay:
  text "Push: 1" at 2935,4240 h35.43
  text "Push: 1" at 3935,4240 h35.43
  text "Push: 1" at 4935,4240 h35.43
  text "Release: 0" at 3045,4060 h35.43
  text "Release: 0" at 4045,4060 h35.43
  text "Release: 0" at 5045,4060 h35.43
  text "Push: 1" at 2935,3940 h35.43
  text "Push: 1" at 3935,3940 h35.43
  text "Push: 1" at 4935,3940 h35.43
  text "Release: 0" at 3045,3760 h35.43
  text "Release: 0" at 4045,3760 h35.43
  text "Release: 0" at 5045,3760 h35.43
  text "Push: 1" at 2935,3640 h35.43
  text "Push: 1" at 3935,3640 h35.43
  text "Push: 1" at 4935,3640 h35.43
  text "Release: 0" at 3045,3460 h35.43
  text "Release: 0" at 4045,3460 h35.43
  text "Release: 0" at 5045,3460 h35.43
  text "Push: 1" at 2935,3340 h35.43
  text "Push: 1" at 3935,3340 h35.43
  text "Push: 1" at 4935,3340 h35.43
  text "Release: 0" at 3045,3160 h35.43
  text "Release: 0" at 4045,3160 h35.43
  text "Release: 0" at 5045,3160 h35.43
  text "Push: 1" at 2935,3040 h35.43
  text "Push: 1" at 3935,3040 h35.43
  text "Push: 1" at 4935,3040 h35.43
  text "Release: 0" at 3045,2860 h35.43
  text "Release: 0" at 4045,2860 h35.43
  text "Release: 0" at 5045,2860 h35.43
  text "Push: 1" at 2935,2740 h35.43
  text "Push: 1" at 3935,2740 h35.43
  text "Push: 1" at 4935,2740 h35.43
  text "Release: 0" at 3045,2560 h35.43
  text "Release: 0" at 4045,2560 h35.43
  text "Release: 0" at 5045,2560 h35.43